# Altium PCB MB_v1.PcbDoc (part 6 of 10)
Units mm, origin at the board's own origin, x right, y up, seen from the top; angles counter-clockwise.
Board outline 203 x 72 mm, 6 copper layers (Top Layer, Layer 3, Layer 1, Layer 2, Layer 4, Bottom Layer), stack 1.52 mm thick; 655 components, 569 nets, 2943 pads, 1834 vias.
Unrouted connection lines stored in the file: 31.
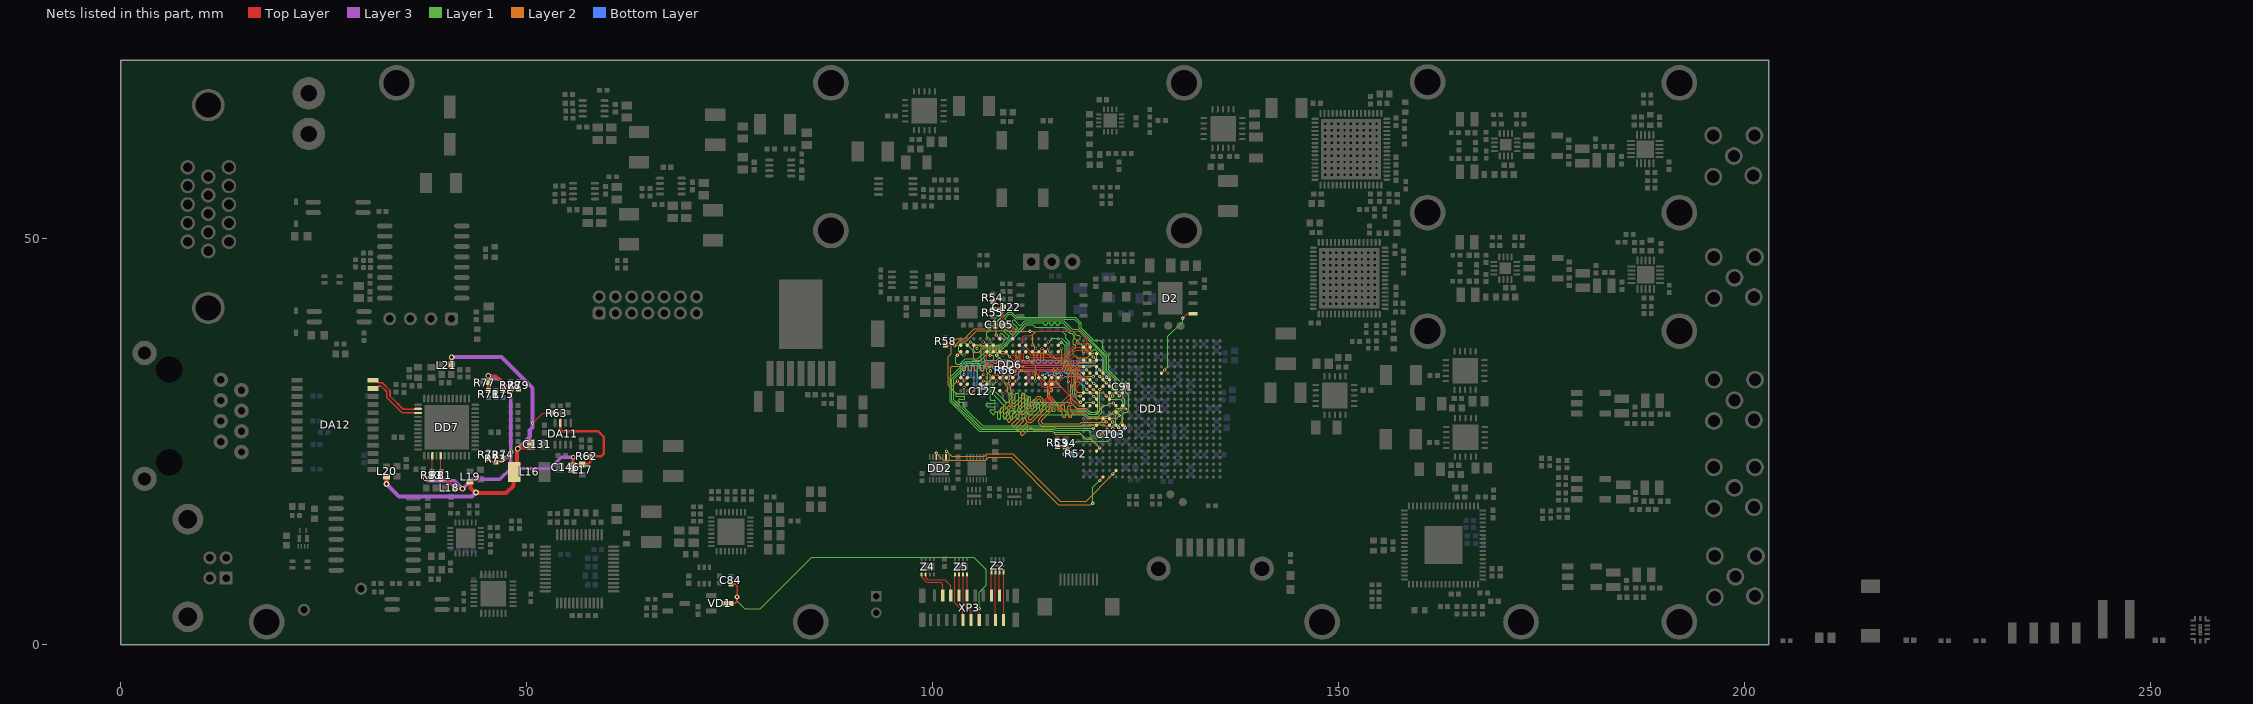
[diagram p9: the nets of this part, all layers, seen from the top]

## Via types
v1: diameter 0.4, hole 0.2, Top Layer to Bottom Layer, tented both sides, 654 vias
v2: diameter 0.8, hole 0.4, Top Layer to Bottom Layer, tented both sides, 489 vias
v3: diameter 0.6, hole 0.3, Top Layer to Bottom Layer, tented both sides, 354 vias
v4: diameter 0.7, hole 0.4, Top Layer to Bottom Layer, tented both sides, 144 vias
v5: diameter 0.8, hole 0.4, Top Layer to Bottom Layer, 87 vias
v6: diameter 0.9, hole 0.5, Top Layer to Bottom Layer, 45 vias
v7: diameter 0.66, hole 0.4, Top Layer to Bottom Layer, 25 vias
v8: diameter 0.7, hole 0.3, Top Layer to Bottom Layer, 13 vias
v9: diameter 0.5, hole 0.2, Top Layer to Bottom Layer, 12 vias
v10: diameter 0.5, hole 0.3, Top Layer to Bottom Layer, 5 vias
v11: diameter 1, hole 0.5, Top Layer to Bottom Layer, 2 vias
v12: diameter 0.4, hole 0.2, Top Layer to Bottom Layer, 2 vias
v13: diameter 0.9, hole 0.4, Top Layer to Bottom Layer, tented both sides, 2 vias

## Nets (pads, with @x,y where several pads share a name; then routed paths per layer and width w, separated by ;. In a path a pad name is that pad's centre, name@x,y a point inside that pad or via, vN(x,y) a via of type N, cw(c..) or ccw(c..) an arc to the next point about the centre after c; other vN are vias at no path point) (continued)
DDR_A5: DD1.K5 DD6.P2 | length 31.9
  Top Layer w0.2: DD6.P2@105.099,36.868 v1(105.501,36.467) ; v1(121.413,30.628) DD1.K5@121.814,30.227
  Layer 2 w0.125: v1(105.501,36.467) 105.553,36.519 105.553,36.675 105.555,36.677 105.555,36.831 105.482,36.904 105.148,36.904 105.075,36.831 105.075,35.175 105.224,35.026 105.641,35.026 ; 105.656,35.026 105.885,35.026 ccw(c105.885,35.151) 106.01,35.151 106.01,36.71 cw(c106.124,36.71) 106.124,36.824 106.276,36.824 cw(c106.276,36.71) 106.389,36.71 106.389,35.151 ccw(c106.514,35.151) 106.514,35.026 107.714,35.026 107.915,35.026 ccw(c107.915,35.151) 108.04,35.151 108.04,35.168 cw(c108.154,35.168) 108.154,35.282 108.305,35.282 cw(c108.305,35.168) 108.419,35.168 108.419,35.151 ccw(c108.544,35.151) 108.544,35.026 110.189,35.026 ccw(c110.189,35.151) 110.314,35.151 110.314,35.99 cw(c110.428,35.99) 110.428,36.104 110.58,36.104 cw(c110.58,35.99) 110.693,35.99 110.693,35.151 ccw(c110.818,35.151) 110.818,35.026 111.26,35.026 111.904,35.026 111.926,35.048 111.97,35.048 ; 111.97,35.048 112.059,35.048 112.436,35.048 ccw(c112.436,35.173) 112.561,35.173 112.561,35.916 cw(c112.675,35.916) 112.675,36.03 112.826,36.03 cw(c112.826,35.916) 112.94,35.916 112.94,35.161 ccw(c113.054,35.161) 113.054,35.048 113.205,35.048 ccw(c113.205,35.161) 113.319,35.161 113.319,35.805 cw(c113.433,35.805) 113.433,35.918 113.584,35.918 cw(c113.584,35.805) 113.698,35.805 113.698,35.173 ccw(c113.823,35.173) 113.823,35.048 114.264,35.048 115.7,35.048 117.563,33.184 117.563,31.426 117.926,31.063 118.39,31.063 118.465,30.988 121.053,30.988 v1(121.413,30.628)
DDR_A6: DD1.J7 DD6.R8 | length 32.5
  Top Layer w0.2: v1(103.896,31.669) DD6.R8@104.297,32.07 ; v1(123.009,30.626) DD1.J7@123.412,31.025
  Layer 1 w0.125: v1(103.896,31.669) 103.896,31.462 103.896,31.084 cw(c103.771,31.084) 103.771,30.959 102.973,30.959 ccw(c102.973,30.845) 102.859,30.845 102.859,30.693 ccw(c102.973,30.693) 102.973,30.58 103.857,30.58 cw(c103.857,30.466) 103.971,30.466 103.971,30.314 cw(c103.857,30.314) 103.857,30.201 103.371,30.201 ccw(c103.371,30.087) 103.257,30.087 103.257,29.935 ccw(c103.371,29.935) 103.371,29.822 103.771,29.822 cw(c103.771,29.697) 103.896,29.697 103.896,29.218 104.17,28.944 104.344,28.77 106.168,26.946 119.51,26.946 119.627,27.063 120.418,27.063 121.803,28.448 122.446,28.448 123.458,29.46 123.458,29.93 123.165,30.223 121.885,30.223 121.812,30.296 121.812,30.952 121.885,31.025 122.612,31.025 123.009,30.628 v1(123.009,30.626)
DDR_A7: DD1.J6 DD6.R2 | length 32.9
  Top Layer w0.2: DD6.R2@104.299,36.868 v1(104.7,37.269) ; v1(122.211,31.426) DD1.J6@122.612,31.025
  Layer 1 w0.125: v1(104.7,37.269) 105.066,36.904 106.044,36.904 106.116,36.832 107.966,36.832 108.351,36.832 108.827,37.308 ccw(c108.739,37.396) 108.827,37.485 108.306,38.006 cw(c108.387,38.086) 108.306,38.166 108.414,38.274 cw(c108.494,38.193) 108.574,38.274 109.106,37.742 ccw(c109.187,37.822) 109.267,37.742 109.374,37.849 ccw(c109.294,37.929) 109.374,38.01 108.788,38.596 cw(c108.868,38.676) 108.788,38.757 108.895,38.864 cw(c108.976,38.784) 109.056,38.864 109.642,38.278 ccw(c109.723,38.358) 109.803,38.278 109.91,38.385 ccw(c109.83,38.465) 109.91,38.546 109.324,39.132 cw(c109.404,39.212) 109.324,39.293 109.431,39.4 cw(c109.512,39.32) 109.592,39.4 110.178,38.814 ccw(c110.259,38.894) 110.339,38.814 110.446,38.921 ccw(c110.366,39.001) 110.446,39.082 109.86,39.668 cw(c109.94,39.748) 109.86,39.829 109.967,39.936 cw(c110.048,39.856) 110.128,39.936 110.703,39.361 ccw(c110.791,39.449) 110.88,39.361 111.397,39.878 116.168,39.878 117.217,38.829 117.88,38.829 121.275,35.434 121.275,33.616 121.877,33.014 121.877,31.76 v1(122.211,31.426)
DDR_A8: DD1.J5 DD6.T8 | length 33.3
  Top Layer w0.2: v1(103.072,32.458) 103.109,32.458 DD6.T8@103.498,32.068 ; DD1.J5@121.812,31.025 v1(122.213,30.624)
  Layer 2 w0.125: v1(103.072,32.458) 103.072,32.442 102.507,31.877 102.38,31.877 102.253,32.004 102.253,34.163 102.36,34.27 103.142,34.27 103.584,34.27 cw(c103.584,34.145) 103.709,34.145 103.709,33.87 ccw(c103.822,33.87) 103.822,33.756 103.974,33.756 ccw(c103.974,33.87) 104.088,33.87 104.088,34.25 cw(c104.201,34.25) 104.201,34.364 104.353,34.364 cw(c104.353,34.25) 104.467,34.25 104.467,33.87 ccw(c104.58,33.87) 104.58,33.756 104.732,33.756 ccw(c104.732,33.87) 104.846,33.87 104.846,34.25 cw(c104.959,34.25) 104.959,34.364 105.111,34.364 cw(c105.111,34.25) 105.225,34.25 105.225,33.87 ccw(c105.338,33.87) 105.338,33.756 105.49,33.756 ccw(c105.49,33.87) 105.604,33.87 105.604,34.25 cw(c105.717,34.25) 105.717,34.364 105.869,34.364 cw(c105.869,34.25) 105.983,34.25 105.983,33.87 ccw(c106.096,33.87) 106.096,33.756 106.248,33.756 ccw(c106.248,33.87) 106.362,33.87 106.362,34.145 cw(c106.487,34.145) 106.487,34.27 108.857,34.27 111.211,34.27 111.322,34.159 114.738,34.159 115.246,33.651 115.246,32.319 117.021,30.544 117.021,29.809 117.896,28.934 118.685,28.934 119.278,28.341 120.097,28.341 120.75,28.994 120.75,29.163 121.053,29.466 121.516,29.466 121.804,29.753 121.804,30.214 v1(122.213,30.624)
DDR_A9: DD1.H5 DD6.R3 | length 32.4
  Top Layer w0.2: v1(103.896,35.669) DD6.R3@104.297,36.07 ; v1(121.411,32.226) DD1.H5@121.812,31.825
  Layer 1 w0.125: v1(103.896,35.669) 103.86,35.704 103.633,35.704 103.235,36.102 103.235,36.898 103.513,37.176 104.066,37.176 105.213,36.029 105.732,36.029 106.285,36.582 108.455,36.582 111.497,39.624 112.413,39.624 113.613,39.624 cw(c113.613,39.499) 113.738,39.499 113.738,39.476 ccw(c113.851,39.476) 113.851,39.362 114.003,39.362 ccw(c114.003,39.476) 114.117,39.476 114.117,39.514 cw(c114.23,39.514) 114.23,39.628 114.382,39.628 cw(c114.382,39.514) 114.496,39.514 114.496,39.476 ccw(c114.609,39.476) 114.609,39.362 114.761,39.362 ccw(c114.761,39.476) 114.875,39.476 114.875,39.514 cw(c114.988,39.514) 114.988,39.628 115.14,39.628 cw(c115.14,39.514) 115.254,39.514 115.254,39.476 ccw(c115.367,39.476) 115.367,39.362 115.519,39.362 ccw(c115.519,39.476) 115.633,39.476 115.633,39.499 cw(c115.758,39.499) 115.758,39.624 116.069,39.624 117.109,38.584 117.29,38.584 117.747,38.127 118.048,38.127 118.191,37.984 118.191,37.636 118.08,37.525 117.875,37.525 117.747,37.397 117.747,37.146 ; 117.752,37.141 117.82,37.072 118.318,37.072 cw(c118.318,36.947) 118.443,36.947 118.443,36.141 ccw(c118.557,36.141) 118.557,36.027 118.709,36.027 ccw(c118.709,36.141) 118.822,36.141 118.822,36.947 cw(c118.947,36.947) 118.947,37.072 119.217,37.072 119.283,37.072 119.327,37.028 119.595,36.76 cw(c119.506,36.672) 119.595,36.584 119.476,36.464 ccw(c119.556,36.384) 119.476,36.304 119.583,36.196 ccw(c119.663,36.277) 119.744,36.196 119.863,36.316 cw(c119.951,36.227) 120.039,36.316 120.37,35.985 120.414,35.941 121.046,35.309 121.046,34.014 121.05,34.01 121.05,32.587 v1(121.411,32.226)
DDR_A10: DD1.J3 DD6.L7 | length 32.8
  Top Layer w0.2: DD6.L7@107.497,32.866 v1(107.899,32.465) ; v1(119.813,31.428) DD1.J3@120.212,31.025
  Layer 1 w0.125: v1(107.899,32.465) 107.461,32.027 107.461,31.469 109.085,29.845 109.344,29.845 ccw(c109.344,29.97) 109.469,29.97 109.469,30.848 cw(c109.583,30.848) 109.583,30.962 109.735,30.962 cw(c109.735,30.848) 109.848,30.848 109.848,29.164 ccw(c109.962,29.164) 109.962,29.05 110.114,29.05 ccw(c110.114,29.164) 110.227,29.164 110.227,30.848 cw(c110.341,30.848) 110.341,30.962 110.493,30.962 cw(c110.493,30.848) 110.606,30.848 110.606,29.164 ccw(c110.72,29.164) 110.72,29.05 110.872,29.05 ccw(c110.872,29.164) 110.986,29.164 110.986,30.848 cw(c111.099,30.848) 111.099,30.962 111.251,30.962 cw(c111.251,30.848) 111.365,30.848 111.365,29.164 ccw(c111.478,29.164) 111.478,29.05 111.63,29.05 ccw(c111.63,29.164) 111.744,29.164 111.744,30.388 cw(c111.857,30.388) 111.857,30.502 112.009,30.502 cw(c112.009,30.388) 112.123,30.388 112.123,29.164 ccw(c112.236,29.164) 112.236,29.05 112.388,29.05 ccw(c112.388,29.164) 112.502,29.164 112.502,29.72 cw(c112.627,29.72) 112.627,29.845 112.689,29.845 116.985,29.845 117.747,29.083 118.89,29.083 119.382,28.591 120.178,28.591 120.359,28.772 120.359,30.882 v1(119.813,31.428)
DDR_A11: DD1.G5 DD6.R7 | length 30.7
  Top Layer w0.2: v1(103.898,32.467) DD6.R7@104.299,32.868 ; v1(121.458,32.921) 121.487,32.921 121.781,32.627 DD1.G5@121.81,32.627
  Bottom Layer w0.125: v1(103.898,32.467) 103.826,32.538 103.826,32.726 103.463,33.088 103.463,34.484 103.698,34.719 104.727,34.719 104.789,34.719 ccw(c104.789,34.844) 104.914,34.844 104.914,34.854 cw(c105.028,34.854) 105.028,34.968 105.179,34.968 cw(c105.179,34.854) 105.293,34.854 105.293,34.808 ccw(c105.407,34.808) 105.407,34.694 105.558,34.694 ccw(c105.558,34.808) 105.672,34.808 105.672,34.854 cw(c105.786,34.854) 105.786,34.968 105.937,34.968 cw(c105.937,34.854) 106.051,34.854 106.051,34.808 ccw(c106.165,34.808) 106.165,34.694 106.316,34.694 ccw(c106.316,34.808) 106.43,34.808 106.43,34.854 cw(c106.544,34.854) 106.544,34.968 106.695,34.968 cw(c106.695,34.854) 106.809,34.854 106.809,34.808 ccw(c106.923,34.808) 106.923,34.694 107.074,34.694 ccw(c107.074,34.808) 107.188,34.808 107.188,34.854 cw(c107.302,34.854) 107.302,34.968 107.453,34.968 cw(c107.453,34.854) 107.567,34.854 107.567,34.781 ccw(c107.681,34.781) 107.681,34.668 107.832,34.668 ccw(c107.832,34.781) 107.946,34.781 107.946,34.854 cw(c108.06,34.854) 108.06,34.968 108.211,34.968 cw(c108.211,34.854) 108.325,34.854 108.325,34.781 ccw(c108.439,34.781) 108.439,34.668 108.59,34.668 ccw(c108.59,34.781) 108.704,34.781 108.704,34.854 cw(c108.818,34.854) 108.818,34.968 108.969,34.968 cw(c108.969,34.854) 109.083,34.854 109.083,34.781 ccw(c109.197,34.781) 109.197,34.668 109.348,34.668 ccw(c109.348,34.781) 109.462,34.781 109.462,34.854 cw(c109.576,34.854) 109.576,34.968 109.727,34.968 cw(c109.727,34.854) 109.841,34.854 109.841,34.781 ccw(c109.955,34.781) 109.955,34.668 110.106,34.668 ccw(c110.106,34.781) 110.22,34.781 110.22,34.854 cw(c110.334,34.854) 110.334,34.968 110.485,34.968 cw(c110.485,34.854) 110.599,34.854 110.599,34.781 ccw(c110.713,34.781) 110.713,34.668 110.864,34.668 ccw(c110.864,34.781) 110.978,34.781 110.978,34.854 cw(c111.092,34.854) 111.092,34.968 111.243,34.968 cw(c111.243,34.854) 111.357,34.854 111.357,34.781 ccw(c111.471,34.781) 111.471,34.668 111.622,34.668 ccw(c111.622,34.781) 111.736,34.781 111.736,34.854 cw(c111.85,34.854) 111.85,34.968 112.001,34.968 cw(c112.001,34.854) 112.115,34.854 112.115,34.781 ccw(c112.229,34.781) 112.229,34.668 112.38,34.668 ccw(c112.38,34.781) 112.494,34.781 112.494,34.854 cw(c112.608,34.854) 112.608,34.968 112.759,34.968 cw(c112.759,34.854) 112.873,34.854 112.873,34.781 ccw(c112.987,34.781) 112.987,34.668 113.138,34.668 ccw(c113.138,34.781) 113.252,34.781 113.252,34.854 cw(c113.366,34.854) 113.366,34.968 113.517,34.968 cw(c113.517,34.854) 113.631,34.854 113.631,34.781 ccw(c113.745,34.781) 113.745,34.668 113.896,34.668 ccw(c113.896,34.781) 114.01,34.781 114.01,34.854 cw(c114.124,34.854) 114.124,34.968 114.275,34.968 cw(c114.275,34.854) 114.389,34.854 114.389,34.781 ccw(c114.503,34.781) 114.503,34.668 114.654,34.668 ccw(c114.654,34.781) 114.768,34.781 114.768,34.854 cw(c114.882,34.854) 114.882,34.968 115.033,34.968 cw(c115.033,34.854) 115.147,34.854 115.147,34.781 ccw(c115.261,34.781) 115.261,34.668 115.412,34.668 ccw(c115.412,34.781) 115.526,34.781 115.526,34.854 cw(c115.64,34.854) 115.64,34.968 115.791,34.968 cw(c115.791,34.854) 115.905,34.854 115.905,34.781 ccw(c116.019,34.781) 116.019,34.668 116.17,34.668 ccw(c116.17,34.781) 116.284,34.781 116.284,34.854 cw(c116.398,34.854) 116.398,34.968 116.549,34.968 cw(c116.549,34.854) 116.663,34.854 116.663,34.781 ccw(c116.777,34.781) 116.777,34.668 116.928,34.668 ccw(c116.928,34.781) 117.042,34.781 117.042,34.854 cw(c117.156,34.854) 117.156,34.968 117.307,34.968 cw(c117.307,34.854) 117.421,34.854 117.421,34.781 ccw(c117.535,34.781) 117.535,34.668 117.686,34.668 ccw(c117.686,34.781) 117.8,34.781 117.8,34.854 cw(c117.914,34.854) 117.914,34.968 118.065,34.968 cw(c118.065,34.854) 118.179,34.854 118.179,34.781 ccw(c118.293,34.781) 118.293,34.668 118.444,34.668 ccw(c118.444,34.781) 118.558,34.781 118.558,34.854 cw(c118.672,34.854) 118.672,34.968 118.823,34.968 cw(c118.823,34.854) 118.937,34.854 118.937,34.844 ccw(c119.062,34.844) 119.062,34.719 119.989,34.719 120.083,34.719 120.427,35.063 120.833,35.063 121.05,34.846 121.05,33.647 121.012,33.609 121.012,33.429 121.458,32.983 v1(121.458,32.921)
DDR_A12: DD1.H4 DD6.N7 | length 33.6
  Top Layer w0.2: DD6.N7@105.901,32.866 v1(106.302,33.267) ; v1(120.609,31.426) DD1.H4@121.01,31.827
  Layer 1 w0.125: v1(106.302,33.267) 105.796,32.761 105.692,32.761 105.555,32.898 105.555,33.974 105.668,34.087 106.52,34.087 106.698,33.909 106.698,33.573 107.102,33.169 107.102,31.176 109.452,28.825 112.67,28.825 112.733,28.825 ccw(c112.733,28.95) 112.858,28.95 112.858,29.472 cw(c112.971,29.472) 112.971,29.586 113.123,29.586 cw(c113.123,29.472) 113.237,29.472 113.237,28.83 ccw(c113.35,28.83) 113.35,28.716 113.502,28.716 ccw(c113.502,28.83) 113.616,28.83 113.616,29.472 cw(c113.729,29.472) 113.729,29.586 113.881,29.586 cw(c113.881,29.472) 113.995,29.472 113.995,28.83 ccw(c114.108,28.83) 114.108,28.716 114.26,28.716 ccw(c114.26,28.83) 114.374,28.83 114.374,29.472 cw(c114.487,29.472) 114.487,29.586 114.639,29.586 cw(c114.639,29.472) 114.753,29.472 114.753,28.83 ccw(c114.866,28.83) 114.866,28.716 115.018,28.716 ccw(c115.018,28.83) 115.132,28.83 115.132,29.472 cw(c115.245,29.472) 115.245,29.586 115.397,29.586 cw(c115.397,29.472) 115.511,29.472 115.511,28.83 ccw(c115.624,28.83) 115.624,28.716 115.776,28.716 ccw(c115.776,28.83) 115.89,28.83 115.89,29.472 cw(c116.003,29.472) 116.003,29.586 116.155,29.586 cw(c116.155,29.472) 116.269,29.472 116.269,28.83 ccw(c116.382,28.83) 116.382,28.716 116.534,28.716 ccw(c116.534,28.83) 116.648,28.83 116.648,29.28 cw(c116.761,29.28) 116.761,29.394 116.913,29.394 cw(c116.913,29.28) 117.027,29.28 117.027,28.95 ccw(c117.152,28.95) 117.152,28.825 118.291,28.825 118.794,28.825 119.278,28.341 120.282,28.341 120.609,28.668 v1(120.609,31.426)
DDR_A13: DD1.F4 DD6.T3 | length 31.9
  Top Layer w0.2: v1(103.073,35.651) 103.077,35.651 DD6.T3@103.496,36.07 ; v1(120.613,33.828) DD1.F4@121.014,33.427
  Layer 1 w0.125: v1(103.073,35.651) 103.073,35.575 102.888,35.39 102.888,34.671 103.015,34.544 103.396,34.544 104.031,35.179 105.58,35.179 106.733,36.332 108.558,36.332 111.6,39.374 112.38,39.374 112.642,39.112 116.227,39.112 117.005,38.334 117.187,38.334 117.473,38.048 117.473,37.644 117.362,37.534 117.362,37.211 117.362,37.019 ccw(c117.487,37.019) 117.487,36.894 117.534,36.894 cw(c117.534,36.78) 117.648,36.78 117.648,36.628 cw(c117.534,36.628) 117.534,36.515 117.487,36.515 ccw(c117.487,36.39) 117.362,36.39 117.362,35.948 117.362,35.702 117.885,35.179 118.944,35.179 119.631,35.866 119.994,35.866 120.25,35.61 120.25,35.247 119.989,34.986 119.724,34.986 119.54,34.802 118.015,34.802 117.942,34.729 117.942,34.31 118.015,34.236 119.456,34.236 119.556,34.337 120.098,34.337 v1@120.606,33.828
DDR_A14: DD1.G4 DD6.T7 | length 30.3
  Top Layer w0.2: DD6.T7@103.499,32.868 v1(103.901,33.269) ; v1(120.613,33.028) DD1.G4@121.014,32.627
  Bottom Layer w0.125: v1(103.901,33.269) 103.901,34.159 103.904,34.163 104.158,34.417 104.277,34.417 cw(c104.277,34.292) 104.402,34.292 104.402,33.02 ccw(c104.516,33.02) 104.516,32.906 104.668,32.906 ccw(c104.668,33.02) 104.781,33.02 104.781,34.355 cw(c104.895,34.355) 104.895,34.469 105.047,34.469 cw(c105.047,34.355) 105.16,34.355 105.16,31.991 ccw(c105.274,31.991) 105.274,31.877 105.426,31.877 ccw(c105.426,31.991) 105.539,31.991 105.539,34.355 cw(c105.653,34.355) 105.653,34.469 105.805,34.469 cw(c105.805,34.355) 105.918,34.355 105.918,33.819 ccw(c106.032,33.819) 106.032,33.705 106.184,33.705 ccw(c106.184,33.819) 106.297,33.819 106.297,34.355 cw(c106.411,34.355) 106.411,34.469 106.563,34.469 cw(c106.563,34.355) 106.676,34.355 106.676,34.234 ccw(c106.79,34.234) 106.79,34.12 106.942,34.12 ccw(c106.942,34.234) 107.055,34.234 107.055,34.355 cw(c107.169,34.355) 107.169,34.469 107.321,34.469 cw(c107.321,34.355) 107.434,34.355 107.434,34.117 ccw(c107.548,34.117) 107.548,34.003 107.7,34.003 ccw(c107.7,34.117) 107.813,34.117 107.813,34.292 cw(c107.938,34.292) 107.938,34.417 108.222,34.417 120.02,34.417 120.175,34.262 120.175,33.466 v1(120.613,33.028)
DDR_BA0: DD1.L7 DD6.M2 | length 30.8
  Top Layer w0.125: v1(109.492,35.491) 110.127,34.856 v1(110.127,33.655)
  Top Layer w0.2: v1(106.298,37.269) DD6.M2@106.699,36.868 ; DD1.L7@123.412,29.425 v1(123.833,29.004)
  Layer 2 w0.125: v1(106.298,37.269) 106.735,36.832 106.735,36.285 106.914,36.106 106.977,36.106 ccw(c106.977,36.231) 107.102,36.231 107.102,36.718 cw(c107.215,36.718) 107.215,36.832 107.367,36.832 cw(c107.367,36.718) 107.481,36.718 107.481,36.196 ccw(c107.594,36.196) 107.594,36.082 107.746,36.082 ccw(c107.746,36.196) 107.86,36.196 107.86,36.765 cw(c107.973,36.765) 107.973,36.879 108.125,36.879 cw(c108.125,36.765) 108.239,36.765 108.239,36.231 ccw(c108.364,36.231) 108.364,36.106 108.877,36.106 v1(109.492,35.491) ; v1(110.127,33.655) 110.134,33.655 110.388,33.909 114.634,33.909 114.959,33.585 114.959,33.181 114.445,32.668 114.445,32.535 114.445,32.472 ccw(c114.57,32.472) 114.57,32.347 114.882,32.347 cw(c114.882,32.233) 114.996,32.233 114.996,32.082 cw(c114.882,32.082) 114.882,31.968 114.555,31.968 ccw(c114.555,31.854) 114.441,31.854 114.441,31.703 ccw(c114.555,31.703) 114.555,31.589 114.712,31.589 cw(c114.712,31.475) 114.825,31.475 114.825,31.324 cw(c114.712,31.324) 114.712,31.21 114.57,31.21 ccw(c114.57,31.085) 114.445,31.085 114.445,30.607 116.368,28.684 118.582,28.684 119.178,28.087 121.109,28.087 121.129,28.107 121.737,28.107 122.729,29.099 123.383,29.099 123.445,29.036 123.8,29.036 v1(123.833,29.004)
DDR_BA1: DD1.L6 DD6.N8 | length 33.4
  Top Layer w0.2: DD6.N8@105.901,32.066 v1(106.302,32.467) ; v1(122.287,29.751) DD1.L6@122.612,29.425 DD1.L6@122.614,29.427
  Layer 1 w0.125: v1(106.302,32.467) 106.314,32.456 106.66,32.456 106.733,32.383 106.733,31.191 107.136,30.788 107.136,30.269 107.136,30.207 ccw(c107.261,30.207) 107.261,30.082 107.633,30.082 cw(c107.633,29.968) 107.747,29.968 107.747,29.817 cw(c107.633,29.817) 107.633,29.703 106.756,29.703 ccw(c106.756,29.589) 106.642,29.589 106.642,29.438 ccw(c106.756,29.438) 106.756,29.324 107.633,29.324 cw(c107.633,29.21) 107.747,29.21 107.747,29.059 cw(c107.633,29.059) 107.633,28.945 107.261,28.945 ccw(c107.261,28.82) 107.136,28.82 107.136,28.648 107.313,28.471 107.463,28.321 107.525,28.321 ccw(c107.525,28.446) 107.65,28.446 107.65,28.581 cw(c107.764,28.581) 107.764,28.695 107.916,28.695 cw(c107.916,28.581) 108.029,28.581 108.029,27.898 ccw(c108.143,27.898) 108.143,27.784 108.295,27.784 ccw(c108.295,27.898) 108.408,27.898 108.408,29.058 cw(c108.522,29.058) 108.522,29.172 108.674,29.172 cw(c108.674,29.058) 108.787,29.058 108.787,27.898 ccw(c108.901,27.898) 108.901,27.784 109.053,27.784 ccw(c109.053,27.898) 109.166,27.898 109.166,28.486 cw(c109.28,28.486) 109.28,28.6 109.432,28.6 cw(c109.432,28.486) 109.545,28.486 109.545,27.898 ccw(c109.659,27.898) 109.659,27.784 109.811,27.784 ccw(c109.811,27.898) 109.924,27.898 109.924,28.486 cw(c110.038,28.486) 110.038,28.6 110.19,28.6 cw(c110.19,28.486) 110.303,28.486 110.303,27.898 ccw(c110.417,27.898) 110.417,27.784 110.569,27.784 ccw(c110.569,27.898) 110.682,27.898 110.682,28.486 cw(c110.796,28.486) 110.796,28.6 110.948,28.6 cw(c110.948,28.486) 111.061,28.486 111.061,28.002 ccw(c111.175,28.002) 111.175,27.889 111.327,27.889 ccw(c111.327,28.002) 111.44,28.002 111.44,28.446 cw(c111.554,28.446) 111.554,28.56 111.706,28.56 cw(c111.706,28.446) 111.819,28.446 ccw(c111.944,28.446) 111.944,28.321 117.25,28.321 118.945,28.321 119.175,28.091 120.385,28.091 120.859,28.564 120.859,29.093 121.231,29.466 121.516,29.466 121.801,29.751 v1(122.287,29.751)
DDR_BA2: DD1.M6 DD6.M3 | length 33.1
  Top Layer w0.125: DD6.M3@106.699,36.068 106.665,36.034 106.665,35.238 106.665,34.911 ccw(c106.79,34.911) 106.79,34.786 109.091,34.786 cw(c109.091,34.673) 109.205,34.673 109.205,34.521 cw(c109.091,34.521) 109.091,34.407 106.79,34.407 ccw(c106.79,34.282) 106.665,34.282 106.665,34.224 106.98,33.909 v1(107.157,33.733)
  Top Layer w0.2: DD1.M6@122.614,28.623 v1(123.033,28.204)
  Layer 2 w0.125: v1(107.157,33.733) 106.74,33.316 106.74,32.529 106.813,32.456 107.023,32.456 107.333,32.766 107.333,33.034 107.517,33.217 ; 107.543,33.217 108.069,33.217 cw(c108.069,33.092) 108.194,33.092 108.194,33.052 ccw(c108.308,33.052) 108.308,32.939 108.46,32.939 ccw(c108.46,33.052) 108.573,33.052 108.573,33.293 cw(c108.687,33.293) 108.687,33.406 108.839,33.406 cw(c108.839,33.293) 108.952,33.293 108.952,33.052 ccw(c109.066,33.052) 109.066,32.939 109.218,32.939 ccw(c109.218,33.052) 109.331,33.052 109.331,33.293 cw(c109.445,33.293) 109.445,33.406 109.597,33.406 cw(c109.597,33.293) 109.71,33.293 109.71,33.052 ccw(c109.824,33.052) 109.824,32.939 109.976,32.939 ccw(c109.976,33.052) 110.089,33.052 110.089,33.092 cw(c110.214,33.092) 110.214,33.217 110.277,33.217 110.325,33.217 110.767,33.659 112.516,33.659 113.131,33.044 113.131,33.036 114.191,31.976 114.191,30.48 114.572,30.099 115.985,28.686 cw(c115.897,28.598) 116.022,28.598 116.022,28.127 ccw(c116.135,28.127) 116.135,28.013 116.287,28.013 ccw(c116.287,28.127) 116.401,28.127 116.401,28.345 cw(c116.514,28.345) 116.514,28.459 116.666,28.459 cw(c116.666,28.345) 116.78,28.345 116.78,28.127 ccw(c116.893,28.127) 116.893,28.013 117.045,28.013 ccw(c117.045,28.127) 117.159,28.127 117.159,28.309 cw(c117.284,28.309) 117.284,28.434 118.001,28.434 118.478,28.434 119.055,27.857 122.686,27.857 v1(123.033,28.204)
DDR_CAS#: DD1.P3 DD6.K3 | length 32.9
  Top Layer w0.2: v1(107.92,35.644) 107.92,35.667 108.297,36.044 DD6.K3@108.297,36.07 ; v1(119.809,26.626) DD1.P3@120.21,27.027
  Layer 1 w0.125: v1(107.92,35.644) 108.49,35.075 109.325,35.075 109.45,34.95 109.45,34.498 109.377,34.425 107.847,34.425 107.367,34.425 ccw(c107.367,34.3) 107.242,34.3 107.242,34.284 cw(c107.128,34.284) 107.128,34.17 106.977,34.17 cw(c106.977,34.284) 106.863,34.284 106.863,34.59 ccw(c106.749,34.59) 106.749,34.703 106.598,34.703 ccw(c106.598,34.59) 106.484,34.59 106.484,34.55 cw(c106.359,34.55) 106.359,34.425 106.297,34.425 104.372,34.425 102.634,32.687 102.634,30.126 106.039,26.721 115.117,26.721 115.212,26.626 v1(119.809,26.626)
DDR_CK_N: DD1.N5 DD6.K7 R56.2 | length 33.9
  Top Layer w0.2: DD6.K7@108.297,32.866 v1(108.698,32.465) ; DD1.N5@121.81,27.823 v1(122.212,27.422)
  Layer 2 w0.125: v1(108.698,32.465) 109.016,32.147 109.016,31.966 109.294,31.688 109.294,31.11 109.294,31.059 109.79,30.563 cw(c109.701,30.475) 109.79,30.387 109.595,30.192 ccw(c109.906,29.882) 109.596,29.571 109.702,29.465 ccw(c110.013,29.775) 110.267,29.417 110.275,29.417 111.244,30.386 cw(c111.325,30.305) 111.405,30.386 111.512,30.279 cw(c111.432,30.198) 111.512,30.118 ; 111.511,30.117 110.591,29.197 ccw(c110.901,28.886) 110.592,28.575 110.697,28.47 ccw(c111.008,28.779) 111.262,28.421 111.271,28.421 113.04,30.19 cw(c113.12,30.11) 113.201,30.19 113.308,30.083 cw(c113.227,30.003) 113.308,29.922 ; 113.307,29.921 111.587,28.201 ccw(c111.897,27.891) 111.587,27.58 111.693,27.474 ccw(c112.004,27.784) 112.258,27.426 112.267,27.426 114.287,29.446 cw(c114.367,29.365) 114.447,29.446 114.555,29.339 cw(c114.474,29.258) 114.555,29.178 ; 114.554,29.177 113.183,27.806 ccw(c113.501,27.488) 113.184,27.169 113.478,26.875 113.991,26.875 118.317,26.875 118.505,27.063 121.151,27.063 121.232,26.982 121.772,26.982 v1(122.212,27.422)
  Bottom Layer w0.125: R56.2@108.407,33.782 108.698,33.49 v1(108.698,32.465)
DDR_CK_P: DD1.N4 DD6.J7 R56.1 | length 32.2
  Top Layer w0.2: DD6.J7@109.097,32.866 v1(109.499,32.465) ; DD1.N4@121.012,27.821 v1(121.413,27.42) ; DD1.N4@121.014,27.823 DD1.N4@121.012,27.825
  Layer 2 w0.125: v1(109.499,32.465) 109.499,32.363 109.341,32.206 109.341,32.1 109.619,31.822 109.619,31.435 109.619,31.194 110.02,30.793 cw(c109.701,30.475) 110.02,30.157 109.825,29.962 ccw(c109.906,29.882) 109.825,29.802 109.932,29.694 ccw(c110.013,29.775) 110.093,29.694 ; 110.094,29.695 111.014,30.616 cw(c111.325,30.305) 111.635,30.616 111.742,30.508 cw(c111.432,30.198) 111.79,29.944 111.79,29.936 110.821,28.967 ccw(c110.901,28.886) 110.821,28.806 110.928,28.699 ccw(c111.008,28.779) 111.089,28.699 ; 111.09,28.7 112.81,30.42 cw(c113.12,30.11) 113.43,30.42 113.538,30.313 cw(c113.227,30.003) 113.585,29.749 113.585,29.74 111.816,27.971 ccw(c111.897,27.891) 111.816,27.81 111.924,27.703 ccw(c112.004,27.784) 112.084,27.703 ; 112.085,27.704 114.057,29.676 cw(c114.367,29.365) 114.677,29.676 114.784,29.568 cw(c114.474,29.258) 114.832,29.004 114.832,28.996 113.413,27.576 ccw(c113.501,27.488) 113.413,27.4 113.613,27.2 114.316,27.2 118.182,27.2 118.37,27.388 121.382,27.388 v1(121.413,27.42)
  Bottom Layer w0.125: R56.1@109.307,33.782 109.499,33.59 v1(109.499,32.465)
DDR_CKE0: DD1.V3 DD6.K9 | length 32.6
  Top Layer w0.2: DD6.K9@108.297,31.266 v1(108.698,30.865) ; DD1.V3@120.212,23.825 v1(120.613,24.226)
  Layer 2 w0.125: v1(108.698,30.865) 108.698,30.131 108.716,30.113 108.76,30.069 109.035,29.794 cw(c108.946,29.706) 109.035,29.618 108.178,28.761 ccw(c108.258,28.68) 108.178,28.6 108.285,28.493 ccw(c108.365,28.573) 108.446,28.493 109.321,29.368 cw(c109.401,29.287) 109.481,29.368 109.589,29.26 cw(c109.508,29.18) 109.589,29.1 108.714,28.225 ccw(c108.794,28.144) 108.714,28.064 108.821,27.957 ccw(c108.901,28.037) 108.982,27.957 109.857,28.832 cw(c109.937,28.751) 110.017,28.832 110.125,28.724 cw(c110.044,28.644) 110.125,28.564 109.25,27.689 ccw(c109.33,27.608) 109.25,27.528 109.357,27.421 ccw(c109.437,27.501) 109.518,27.421 110.393,28.296 cw(c110.473,28.215) 110.553,28.296 110.661,28.188 cw(c110.58,28.108) 110.661,28.028 109.786,27.153 ccw(c109.866,27.072) 109.786,26.992 109.893,26.885 ccw(c109.973,26.965) 110.054,26.885 110.929,27.76 cw(c111.009,27.679) 111.089,27.76 111.197,27.652 cw(c111.116,27.572) 111.197,27.492 110.322,26.617 ccw(c110.402,26.536) 110.322,26.456 110.429,26.349 ccw(c110.509,26.429) 110.59,26.349 111.465,27.224 cw(c111.545,27.143) 111.625,27.224 111.733,27.116 cw(c111.652,27.036) 111.733,26.956 110.858,26.081 ; 110.858,25.92 cw(c110.938,26) 110.858,26.081 ; 110.858,25.92 110.965,25.813 ccw(c111.045,25.893) 111.126,25.813 111.983,26.67 cw(c112.071,26.581) 112.159,26.67 112.203,26.626 112.52,26.309 114.753,26.309 115.154,25.908 118.255,25.908 118.89,25.273 119.567,25.273 v1(120.613,24.226)
DDR_CS#: DD1.P6 DD6.L2 | length 32.5
  Top Layer w0.2: v1(107.098,37.269) DD6.L2@107.499,36.868 ; DD1.P6@122.61,27.023 122.614,27.023 v1(122.936,26.7)
  Layer 1 w0.125: v1(107.098,37.269) 107.098,37.612 106.715,37.995 106.715,38.378 107.327,38.99 107.327,39.199 107.125,39.4 107.125,39.523 108.05,40.448 108.851,40.448 109.318,40.915 109.785,40.915 110.372,40.328 117.57,40.328 118.317,39.581 118.317,39.028 118.643,38.701 119.883,37.462 120.613,37.462 120.975,37.1 120.975,36.37 121.74,35.605 121.74,33.787 123.376,32.151 123.376,31.549 124.195,30.73 124.195,28.854 123.983,28.641 123.719,28.641 123.395,28.318 123.395,27.488 122.936,27.029 v1(122.936,26.7)
DDR_D0: DD1.D1 DD6.H3 | length 10.4
  Top Layer w0.125: DD6.H3@109.899,36.068 109.899,35.694 110.023,35.57 110.409,35.57 110.482,35.497 110.482,34.609 110.686,34.405 112.229,34.405 112.282,34.458 116.725,34.458 117.292,35.025 DD1.D1@118.612,35.025
DDR_D1: DD1.C3 DD6.F2 | length 10.9
  Top Layer w0.125: DD6.F2@111.499,36.868 111.536,36.831 111.536,36.593 111.897,36.233 111.897,35.908 112.134,35.67 116.259,35.67 117.729,37.141 118.182,37.141 118.286,37.037 118.748,37.037 119,36.786 119,36.489 119.276,36.213 119.573,36.213 119.919,35.866 120.171,35.866 DD1.C3@120.212,35.825
DDR_D2: DD1.B2 DD6.G2 | length 11
  Top Layer w0.125: DD6.G2@110.699,36.868 111.097,37.266 111.097,37.828 111.334,38.066 112.082,38.066 112.087,38.07 112.255,38.07 112.57,38.385 112.57,38.553 112.603,38.586 117.999,38.586 118.773,37.813 119.024,37.561 119.024,37.264 119.25,37.039 119.25,36.836 119.412,36.673 DD1.B2@119.412,36.625
DDR_D3: DD1.D3 DD6.E3 | length 12.1
  Top Layer w0.2: DD6.E3@112.301,36.066 v1(112.702,36.467) ; v1(119.813,35.428) DD1.D3@120.214,35.027
  Layer 2 w0.125: v1(112.702,36.467) 112.631,36.539 112.631,36.739 112.347,37.023 112.347,38.163 112.771,38.586 116.655,38.586 116.907,38.334 117.187,38.334 117.473,38.048 117.473,37.768 v1(119.813,35.428)
DDR_D4: DD1.E3 DD6.H7 | length 11.8
  Top Layer w0.125: DD6.H7@109.899,32.868 110.249,33.217 110.308,33.217 110.651,33.56 110.651,33.75 110.491,33.909 110.491,34.013 110.634,34.155 112.681,34.155 112.685,34.159 116.78,34.159 117.292,34.671 118.418,34.671 118.451,34.637 119.573,34.637 119.606,34.671 119.766,34.671 DD1.E3@120.212,34.225
DDR_D5: DD1.E1 DD6.F7 | length 10.3
  Top Layer w0.125: DD6.F7@111.499,32.868 111.499,32.948 111.651,33.1 111.651,33.253 111.176,33.728 111.176,33.832 111.25,33.905 112.784,33.905 112.788,33.909 116.883,33.909 117.039,34.065 117.199,34.225 117.27,34.225 cw(c117.27,34.1) 117.395,34.1 117.395,33.957 ccw(c117.471,33.957) 117.471,33.88 117.573,33.88 ccw(c117.573,33.957) 117.65,33.957 117.65,34.369 cw(c117.726,34.369) 117.726,34.446 117.828,34.446 cw(c117.828,34.369) 117.905,34.369 117.905,33.957 ccw(c117.981,33.957) 117.981,33.88 118.083,33.88 ccw(c118.083,33.957) 118.16,33.957 118.16,34.1 cw(c118.285,34.1) 118.285,34.225 DD1.E1@118.612,34.225
DDR_D6: DD1.F2 DD6.H8 | length 10.9
  Top Layer w0.2: DD6.H8@109.901,32.066 v1(110.302,32.467) ; v1(118.986,33.855) 118.986,33.853 119.412,33.427 DD1.F2@119.414,33.427
  Bottom Layer w0.125: v1(110.302,32.467) 110.66,32.825 110.66,33.552 110.936,33.828 118.96,33.828 v1(118.986,33.855)
DDR_D7: DD1.F1 DD6.F8 | length 9.9
  Top Layer w0.125: DD6.F8@111.499,32.068 111.901,32.47 111.901,33.033 111.905,33.036 111.905,33.582 111.925,33.602 111.978,33.655 112.243,33.655 cw(c112.243,33.53) 112.368,33.53 112.368,33.317 ccw(c112.444,33.317) 112.444,33.24 112.546,33.24 ccw(c112.546,33.317) 112.623,33.317 112.623,33.604 cw(c112.699,33.604) 112.699,33.68 112.801,33.68 cw(c112.801,33.604) 112.878,33.604 112.878,33.317 ccw(c112.954,33.317) 112.954,33.24 113.056,33.24 ccw(c113.056,33.317) 113.133,33.317 113.133,33.53 cw(c113.258,33.53) 113.258,33.655 113.633,33.655 118.382,33.655 DD1.F1@118.612,33.425
DDR_D8: DD1.G2 DD6.B8 | length 12.4
  Top Layer w0.125: DD6.B8@114.699,32.068 114.692,32.075 114.391,32.075 114.318,32.148 114.318,32.385 114.403,32.47 115.774,32.47 116.316,33.013 116.743,33.013 116.805,33.013 ccw(c116.805,33.138) 116.93,33.138 116.93,33.353 cw(c117.007,33.353) 117.007,33.43 117.109,33.43 cw(c117.109,33.353) 117.185,33.353 117.185,31.646 ccw(c117.262,31.646) 117.262,31.569 117.364,31.569 ccw(c117.364,31.646) 117.44,31.646 117.44,33.353 cw(c117.517,33.353) 117.517,33.43 117.619,33.43 cw(c117.619,33.353) 117.695,33.353 117.695,32.358 ccw(c117.772,32.358) 117.772,32.281 117.874,32.281 ccw(c117.874,32.358) 117.95,32.358 117.95,33.286 cw(c118.027,33.286) 118.027,33.363 118.129,33.363 cw(c118.129,33.286) 118.205,33.286 118.205,33.138 ccw(c118.33,33.138) 118.33,33.013 118.675,33.013 119.024,33.013 DD1.G2@119.412,32.625
DDR_D9: DD1.G1 DD6.A7 | length 9.8
  Top Layer w0.125: v1(116.76,32.414) 116.731,32.385 116.731,31.269 117.594,30.406 117.698,30.406 117.771,30.479 117.771,31.248 117.7,31.319 117.7,31.682 117.768,31.75 117.768,31.781 DD1.G1@118.612,32.625
  Top Layer w0.2: DD6.A7@115.501,32.866 115.524,32.866 115.876,33.217 v1(115.902,33.217)
  Layer 1 w0.125: v1(115.902,33.217) 115.825,33.217 115.642,33.401 115.326,33.401 115.128,33.599 115.128,33.703 115.588,34.163 115.877,34.163 116.731,33.309 116.731,32.442 v1(116.76,32.414)
DDR_D10: DD1.L1 DD6.C8 | length 11
  Top Layer w0.125: DD6.C8@113.899,32.068 113.979,32.068 114.131,31.916 114.167,31.916 114.412,31.67 115.894,31.67 115.922,31.67 115.952,31.64 116.756,30.836 cw(c116.668,30.748) 116.756,30.659 115.708,29.611 ; 115.708,29.611 ccw(c115.788,29.53) 115.708,29.45 115.815,29.343 ccw(c115.895,29.423) 115.976,29.343 117.059,30.427 cw(c117.14,30.346) 117.22,30.427 117.327,30.319 cw(c117.247,30.239) 117.327,30.159 116.78,29.611 ccw(c116.86,29.53) 116.78,29.45 116.887,29.343 ccw(c116.967,29.423) 117.048,29.343 117.56,29.855 cw(c117.648,29.767) 117.737,29.855 117.747,29.845 117.747,29.63 117.936,29.441 117.962,29.416 118,29.416 118.603,29.416 DD1.L1@118.612,29.425
DDR_D11: DD1.L2 DD6.D7 | length 11.9
  Top Layer w0.125: DD6.D7@113.099,32.868 113.136,32.831 113.136,32.593 113.497,32.233 113.497,31.908 113.739,31.666 114.064,31.666 114.301,31.428 114.301,30.7 114.301,30.637 ccw(c114.426,30.637) 114.426,30.512 114.695,30.512 cw(c114.695,30.436) 114.771,30.436 114.771,30.334 cw(c114.695,30.334) 114.695,30.257 113.999,30.257 ccw(c113.999,30.181) 113.923,30.181 113.923,30.079 ccw(c113.999,30.079) 113.999,30.002 114.695,30.002 cw(c114.695,29.926) 114.771,29.926 114.771,29.824 cw(c114.695,29.824) 114.695,29.747 114.426,29.747 ccw(c114.426,29.622) 114.301,29.622 114.301,29.394 114.393,29.303 114.683,29.013 119,29.013 DD1.L2@119.412,29.425
DDR_D12: DD1.L3 DD6.C3 | length 11.8
  Top Layer w0.2: DD6.C3@113.901,36.066 v1(114.302,36.467) ; v1(119.813,29.828) DD1.L3@120.212,29.425
  Layer 1 w0.125: v1(114.302,36.467) 114.302,36.091 117.169,33.225 117.169,32.204 117.021,32.056 117.021,30.394 118.027,29.388 118.491,29.388 118.932,29.828 v1(119.813,29.828)
DDR_D13: DD1.K1 DD6.A3 | length 8.9
  Top Layer w0.2: DD6.A3@115.501,36.066 v1(115.902,36.467) ; v1(118.209,29.853) 118.224,29.853 118.598,30.227 DD1.K1@118.61,30.227
  Layer 1 w0.125: v1(115.902,36.467) 115.902,34.845 117.419,33.329 117.419,32.1 117.271,31.953 117.271,30.729 118.147,29.853 v1(118.209,29.853)
DDR_D14: DD1.J1 DD6.A2 | length 9.1
  Top Layer w0.2: DD6.A2@115.501,36.866 115.524,36.866 115.85,37.192 v1(115.877,37.192) ; v1(118.209,30.626) DD1.J1@118.61,31.027
  Layer 1 w0.125: v1(115.877,37.192) 115.978,37.192 116.362,36.808 116.362,34.739 117.669,33.433 117.669,31.997 117.521,31.849 117.521,30.846 117.742,30.626 v1(118.209,30.626)
DDR_D15: DD1.K3 DD6.C2 | length 12
  Top Layer w0.2: DD6.C2@113.901,36.866 v1(114.302,37.267) ; v1(119.886,30.55) 120.21,30.227 DD1.K3@120.212,30.225
  Layer 1 w0.125: v1(114.302,37.267) 114.74,37.705 115.362,37.705 115.388,37.679 116.009,37.679 116.612,37.076 116.612,34.843 117.919,33.536 117.919,32.483 118.575,31.827 118.575,31.247 118.831,30.991 119.45,30.991 119.886,30.555 v1(119.886,30.55)
DDR_DM0: DD1.B1 DD6.E7 | length 11.4
  Top Layer w0.125: v1(111.677,35.395) 111.702,35.42 116.363,35.42 117.567,36.625 DD1.B1@118.612,36.625
  Top Layer w0.2: DD6.E7@112.297,32.866 v1(112.698,32.465)
  Layer 1 w0.125: v1(111.677,35.395) 112.157,34.915 112.271,34.915 112.698,34.488 v1(112.698,32.465)
DDR_DM1\: DD1.H3 DD6.D3 | length 9.2
  Top Layer w0.2: DD6.D3@113.101,36.066 v1(113.502,36.467) ; v1(119.886,32.15) 120.21,31.827 DD1.H3@120.212,31.825
  Layer 2 w0.125: v1(113.502,36.467) 114.668,35.302 115.799,35.302 118.335,32.766 119.27,32.766 v1(119.886,32.15)
DDR_DQS0_N: DD1.D2 DD6.G3 | length 10.5
  Top Layer w0.125: DD6.G3@110.699,36.068 110.937,35.83 110.937,35.384 110.937,34.919 111.2,34.655 112.126,34.655 112.198,34.727 116.6,34.727 117.502,35.628 117.605,35.628 117.842,35.391 118.385,35.391 118.407,35.413 119.024,35.413 DD1.D2@119.412,35.025
DDR_DQS0_P: DD1.C2 DD6.F3 | length 10
  Top Layer w0.125: DD6.F3@111.499,36.068 111.262,35.83 111.262,35.519 111.262,35.053 111.335,34.98 111.991,34.98 112.063,35.052 116.466,35.052 117.68,36.266 118.288,36.266 118.317,36.237 118.721,36.237 118.746,36.213 118.773,36.213 119,35.986 119,35.959 119.124,35.835 119.402,35.835 DD1.C2@119.412,35.825
DDR_DQS1_N: DD1.J2 DD6.B7 | length 6.9
  Top Layer w0.2: v1(114.368,33.217) 114.368,33.208 114.701,32.875 DD6.B7@114.701,32.87 ; v1(119.013,31.428) DD1.J2@119.412,31.025
  Bottom Layer w0.125: v1(114.368,33.217) 114.421,33.27 114.57,33.27 114.579,33.278 114.861,33.278 115.111,33.028 115.419,33.028 115.593,32.855 116.159,32.855 116.38,33.076 117.802,33.076 118.439,32.439 118.439,32.002 v1(119.013,31.428)
DDR_DQS1_P: DD1.H2 DD6.C7 | length 7.5
  Top Layer w0.2: v1(113.568,33.217) 113.568,33.208 113.901,32.875 DD6.C7@113.901,32.87 ; v1(119.013,32.228) DD1.H2@119.412,31.825
  Bottom Layer w0.125: v1(113.568,33.217) 113.621,33.27 113.908,33.27 114.241,33.603 114.996,33.603 115.246,33.353 115.419,33.353 115.646,33.58 116.201,33.58 116.38,33.401 117.936,33.401 118.764,32.574 118.764,32.489 119.013,32.24 v1(119.013,32.228)
DDR_ODT: DD1.P5 DD6.K1 | length 33.5
  Top Layer w0.2: v1(107.863,38.126) 107.863,38.115 108.301,37.677 DD6.K1@108.301,37.67 ; DD1.P5@121.81,26.993 DD1.P5@121.81,27.023 ; DD1.P5@121.81,27.027 DD1.P5@121.81,27.023 ; v1(122.212,26.622) DD1.P5@121.81,27.023
  Layer 1 w0.125: v1(107.863,38.126) 107.863,38.811 107.863,38.9 ccw(c107.669,38.9) 107.807,39.037 107.562,39.281 cw(c107.642,39.362) 107.562,39.442 107.669,39.549 cw(c107.75,39.469) 107.83,39.549 108.466,38.914 ccw(c108.546,38.994) 108.627,38.914 108.734,39.021 ccw(c108.653,39.101) 108.734,39.182 108.098,39.817 cw(c108.178,39.898) 108.098,39.978 108.205,40.085 cw(c108.286,40.005) 108.366,40.085 109.002,39.45 ccw(c109.082,39.53) 109.163,39.45 109.27,39.557 ccw(c109.189,39.637) 109.27,39.718 108.942,40.045 cw(c109.031,40.133) 108.942,40.222 109.411,40.69 109.692,40.69 110.279,40.103 116.261,40.103 116.264,40.1 117.48,40.1 118.092,39.488 118.092,38.935 121.5,35.527 121.5,33.709 122.538,32.671 122.538,31.611 123.426,30.724 123.426,30.451 123.683,30.194 123.683,29.367 122.574,28.258 122.574,27.271 122.362,27.059 122.217,26.914 122.217,26.627 v1(122.212,26.622)
DDR_RAS#: DD1.R5 DD6.J3 | length 33.9
  Top Layer w0.2: v1(108.696,35.669) DD6.J3@109.097,36.07 ; v1(121.499,26.53) 121.503,26.53 121.806,26.227 DD1.R5@121.81,26.227
  Layer 1 w0.125: v1(108.696,35.669) 108.328,36.036 106.943,36.036 105.832,34.925 104.158,34.925 102.169,32.936 102.169,29.885 105.782,26.271 114.86,26.271 115.009,26.122 118.071,26.122 118.743,25.45 120.852,25.45 121.494,26.093 121.494,26.525 v1(121.499,26.53)
DDR_RESET#: DD1.F3 DD6.T2 R58.1 | length 24.2
  Top Layer w0.125: R58.1@101.618,36.888 101.638,36.868 DD6.T2@103.499,36.868
  Top Layer w0.2: v1(119.809,33.026) DD1.F3@120.21,33.427
  Layer 1 w0.125: v1(112.032,38.608) 115.996,38.608 116.429,38.175 116.429,37.712 116.862,37.28 116.862,34.946 118.783,33.026 v1(119.809,33.026)
  Layer 2 w0.125: v1(102.761,36.83) 103.338,37.407 104.219,37.407 105.461,38.649 109.425,38.649 109.466,38.608 v1(112.032,38.608)
DDR_VREF: C91.2 C94.2 C103.2 DD1.H7 DD1.P7 R52.2 R53.1 | length 20.7
  Top Layer w0.125: R53.1@115.425,24.4 115.46,24.365 C94.2@116.425,24.365 116.317,24.257 v3(116.317,23.445)
  Top Layer w0.2: DD1.P7@123.41,27.023 123.414,27.023 v1(123.738,26.698) ; DD1.H7@123.412,31.825 v1(123.813,32.226)
  Layer 1 w0.125: v3(116.317,23.445) 116.317,23.567 117.797,25.047 121.605,25.047 122.017,25.459 122.499,25.459 v1(123.738,26.698)
  Layer 2 w0.125: v1(123.738,26.698) 123.734,26.703 123.734,26.991 123.451,27.274 123.451,28.374 123.691,28.614 123.955,28.614 124.195,28.854 124.195,30.707 123.813,31.089 v1(123.813,32.226)
  Bottom Layer w0.3: v3(116.317,23.445) 117.145,23.445 R52.2@117.2,23.5 ; C103.2@122.41,25.9 122.474,25.964 123.004,25.964 v1(123.738,26.698)
DDR_VREF2: C105.2 C122.1 C127.1 DD6.H1 DD6.M8 R54.2 R55.1 | length 26.6
  Top Layer w0.125: R54.2@107.45,42.275 R55.1@107.45,41.3 107.725,41.575 C122.1@108.715,41.575 108.715,41.125 108.525,40.935 v1(108.525,40.925) 108.525,40.851 108.713,40.663 C105.2@108.713,39.37 109.794,39.37 109.899,39.265 DD6.H1@109.899,37.668
  Top Layer w0.2: v1(106.296,31.669) DD6.M8@106.697,32.07
  Layer 2 w0.125: v1(106.296,31.669) 105.502,31.669 104.753,30.92 102.951,30.92 101.957,31.915 101.957,35.473 102.323,35.84 102.323,37.011 102.969,37.657 103.947,37.657 105.172,38.882 107.046,38.882 108.525,40.361 v1(108.525,40.925)
DDR_WE#: DD1.R4 DD6.L3 | length 32.6
  Top Layer w0.2: v1(107.103,35.644) 107.103,35.658 107.497,36.052 DD6.L3@107.497,36.07 ; v1(120.609,25.826) DD1.R4@121.01,26.227
  Layer 1 w0.125: v1(107.103,35.644) 107.113,35.655 107.445,35.655 107.525,35.575 107.525,35.147 107.415,35.037 106.464,35.037 106.102,34.675 104.304,34.675 102.394,32.764 102.394,30.013 105.911,26.496 114.988,26.496 115.109,26.375 119.262,26.375 119.41,26.227 119.41,25.84 119.525,25.725 120.102,25.725 120.175,25.798 120.175,26.117 120.283,26.225 120.939,26.225 121.012,26.152 121.012,25.928 120.909,25.826 v1(120.609,25.826)
DIS_CW_KEY: C84.2 VD1.3 XP3.13 | length 45.4
  Top Layer w0.125: XP3.13@105.761,3.034 v1@105.761,4.436
  Top Layer w0.2: VD1.3@74.837,5.08 75.73,5.08 75.925,5.275 v3(75.925,5.875) 75.95,5.9 75.95,7.225 75.71,7.465 C84.2@75.175,7.465
  Layer 1 w0.125: v3(75.925,5.875) 75.925,5.375 76.875,4.425 78.807,4.425 85.122,10.741 105.103,10.741 106.638,9.206 106.638,7.3 105.775,6.437 v1(105.775,4.45)
DIS_LHP: XP3.4 Z4.5 | length 4.7
  Top Layer w0.125: Z4.5@98.675,8.65 98.675,8.3 99.325,7.65 101,7.65 101.261,7.389 XP3.4@101.261,6.034
DIS_LMICN: XP3.11 Z5.7 | length 6
  Top Layer w0.125: Z5.7@103.775,8.65 103.775,5 104.761,4.014 XP3.11@104.761,3.034
DIS_LMICP: XP3.10 Z5.8 | length 2.6
  Top Layer w0.125: XP3.10@104.261,6.034 104.275,6.048 Z5.8@104.275,8.65
DIS_RHP: XP3.6 Z4.6 | length 5.1
  Top Layer w0.125: Z4.6@99.175,8.65 99.175,8.25 99.425,8 101.525,8 102.261,7.264 XP3.6@102.261,6.034
DIS_RMICN: XP3.9 Z5.5 | length 6
  Top Layer w0.125: Z5.5@102.775,8.65 102.775,5.175 103.761,4.189 XP3.9@103.761,3.034
DIS_RMICP: XP3.8 Z5.6 | length 2.6
  Top Layer w0.125: XP3.8@103.261,6.034 103.275,6.048 Z5.6@103.275,8.65
DIS_RS422_RX: DD1.AA6 DD2.2 | length 26
  Top Layer w0.125: DD2.2@101.675,23.095 101.706,23.126 101.706,23.781 v1(101.738,23.812)
  Top Layer w0.2: v1(122.211,21.024) DD1.AA6@122.612,21.425
  Layer 2 w0.125: v1(101.738,23.812) 102.375,23.175 106.412,23.175 106.737,23.5 109.9,23.5 115.723,17.677 118.923,17.677 122.211,20.965 v1(122.211,21.024)
DIS_RS422_TX: DD1.AB4 DD2.5 | length 26.5
  Top Layer w0.125: DD2.5@100.475,23.095 v1(100.475,23.587)
  Top Layer w0.2: v1(120.611,20.224) DD1.AB4@121.012,20.625
  Layer 1 w0.125: v1(119.75,17.412) 119.75,19.363 v1(120.611,20.224)
  Layer 2 w0.125: v1(100.475,23.587) 101.337,22.725 106.598,22.725 106.923,23.05 109.682,23.05 115.504,17.227 119.527,17.227 119.712,17.412 v1(119.75,17.412)
DIS_RS422A: XP3.19 Z2.4 | length 5.9
  Top Layer w0.125: XP3.19@108.761,3.034 108.761,8.911 Z2.4@108.775,8.925
DIS_RS422B: XP3.18 Z2.3 | length 2.9
  Top Layer w0.125: XP3.18@108.261,6.034 108.261,8.911 Z2.3@108.275,8.925
DIS_RS422Y: XP3.16 Z2.1 | length 2.9
  Top Layer w0.125: XP3.16@107.261,6.034 107.261,8.911 Z2.1@107.275,8.925
DIS_RS422Z: XP3.17 Z2.2 | length 5.9
  Top Layer w0.125: XP3.17@107.761,3.034 107.761,8.911 Z2.2@107.775,8.925
EEPROM_CS: D2.1 DD1.F13 | length 9.4
  Top Layer w0.125: v1(130.825,40.2) 131.392,40.767 D2.1@132.098,40.767
  Top Layer w0.2: DD1.F13@128.212,33.425 v1(128.613,33.826)
  Layer 1 w0.125: v1(128.613,33.826) 129.012,34.225 129.012,37.962 130.825,39.775 v1(130.825,40.2)
ETH0_1V2: C131.2 L16.2 L19.1 L20.1 L21.1 R63.2 | length 50
  Top Layer w0.125: v1(50.75,27.275) 51.981,28.506 R63.2@53.271,28.506
  Top Layer w0.5: v4(32.75,19.775) 32.758,19.783 32.758,20.698 L20.1@32.766,20.706 ; L21.1@40.762,34.417 40.762,35.387 v4(40.775,35.4) ; L19.1@43.053,20.071 43.104,20.02 43.104,19.296 43.725,18.675 47.5,18.675 48.385,19.56 48.385,21.155 48.848,21.618 48.848,23.994 48.925,24.071 v4(48.925,24.125) 48.979,24.125 49.15,24.296 50.32,24.296 50.57,24.546 C131.2@50.57,24.696
  Layer 3 w0.5: v4(32.75,19.775) 34.275,18.25 43.3,18.25 v4(43.773,18.723) ; v4(40.775,35.4) 46.925,35.4 50.75,31.575 v1(50.75,27.275) 50.75,26.753 50.4,26.403 50.4,25.6 v4(48.925,24.125)
ETH0_3V3: C146.2 DA11.7 L17.2 L18.1 R62.2 R71.2 R72.2 R73.2 R74.2 R75.2 R77.2 R78.2 R79.2 R81.1 R83.1 | length 63.1
  Top Layer w0.3: v3(37.55,20.45) 37.586,20.414 38.318,20.414 R83.1@38.354,20.378 ; R81.1@39.497,20.378 39.499,20.376 40.071,20.376 40.873,19.574 40.948,19.574 41.143,19.379 L18.1@41.143,19.304 41.247,19.2 v4(42.125,19.2) ; R72.2@45.339,22.918 45.325,22.904 45.325,22.825 45.432,22.825 45.489,22.768 45.489,22.702 45.665,22.526 46.149,22.526 R73.2@46.225,22.45 46.331,22.556 46.755,22.556 R74.2@47.117,22.918 47.693,22.918 48.05,23.275 v4(48.05,23.725) ; R71.2@45.339,31.311 45.281,31.369 R77.2@45.281,32.258 45.278,32.261 45.278,33.097 v4(45.275,33.1) 46.225,33.1 47.117,32.208 R75.2@47.117,31.311 47.306,31.5 R78.2@48.075,31.5 R79.2@49.025,31.5 ; DA11.7@54.158,27.316 54.158,26.567 54.425,26.3 58.8,26.3 59.5,25.6 59.5,23.475 59.2,23.175 R62.2@57.85,23.175 57.85,22.451 57.674,22.275 56.97,22.275 L17.2@56.875,22.18 55.93,22.18 C146.2@55.6,21.85
  Top Layer w0.4: C146.2@55.6,21.85 55.712,21.962 55.712,23.037 v3(55.75,23.075)
  Layer 3 w0.4: v3(37.55,20.45) 37.604,20.45 37.881,20.173 41.152,20.173 v4(42.125,19.2) 43.275,20.35 46.727,20.35 48.05,21.673 ; v4(45.275,33.1) 45.309,33.1 45.659,32.75 46.575,32.75 48.05,31.275 v4(48.05,23.725) 48.05,21.673 ; v3(55.75,23.075) 54.275,23.075 52.873,21.673 48.05,21.673
ETH0_LEDGRN: DD7.17 R81.2 | length 2
  Top Layer w0.125: DD7.17@39.413,23.252 39.413,21.362 R81.2@39.497,21.278
ETH0_LEDYEL: DD7.15 R83.2 | length 2
  Top Layer w0.125: R83.2@38.354,21.278 38.354,21.728 38.413,21.787 DD7.15@38.413,23.252
ETH0_TD0_N: DA12.11 DD7.3 | length 7.5
  Top Layer w0.2: DA12.11@31.091,31.551 31.466,31.551 31.766,31.851 32.066,31.851 32.783,31.134 32.783,30.444 34.65,28.577 36.236,28.577 36.286,28.527 DD7.3@36.638,28.527
ETH0_TD0_P: DA12.12 DD7.2 | length 7.5
  Top Layer w0.2: DA12.12@31.091,32.551 31.466,32.551 31.766,32.251 32.232,32.251 33.183,31.3 33.183,30.61 34.816,28.977 36.236,28.977 36.286,29.027 DD7.2@36.638,29.027